# Altium PCB BaseBoardV2.3.PcbDoc
Units mil, origin at the board's own origin, x right, y up, seen from the top; angles counter-clockwise.
Board outline 15200 x 8600 mil, 2 copper layers (Top Layer, Bottom Layer); 48 components, 85 nets, 512 pads, 419 vias.
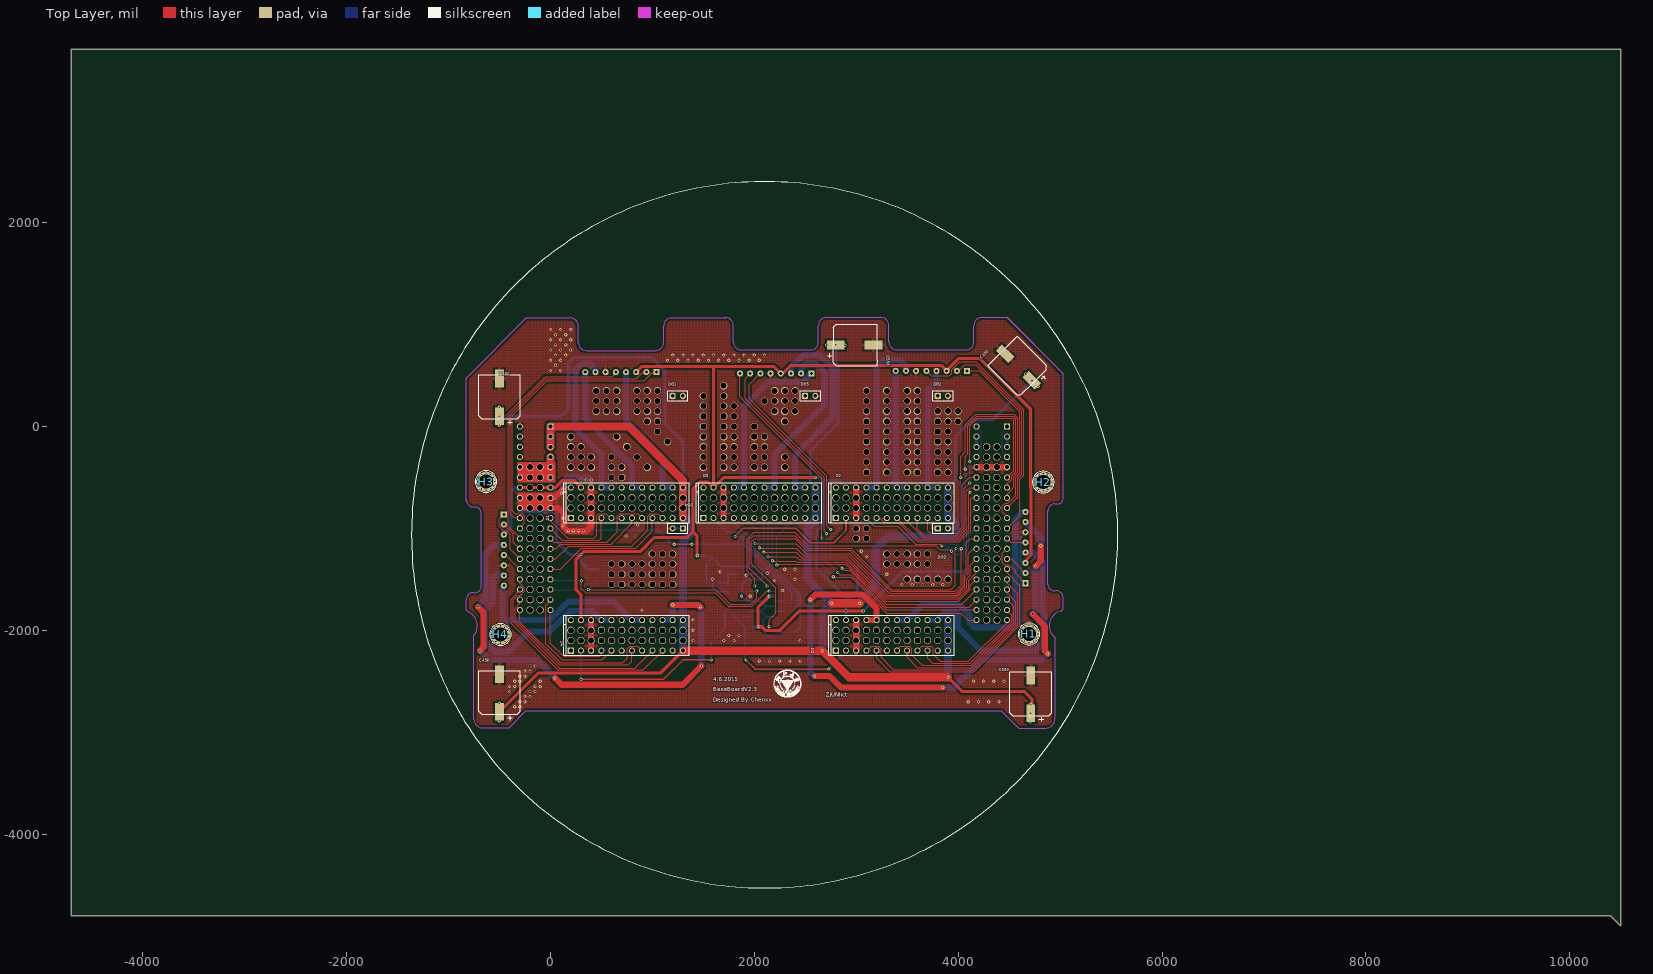
[diagram p0: Top Layer view]
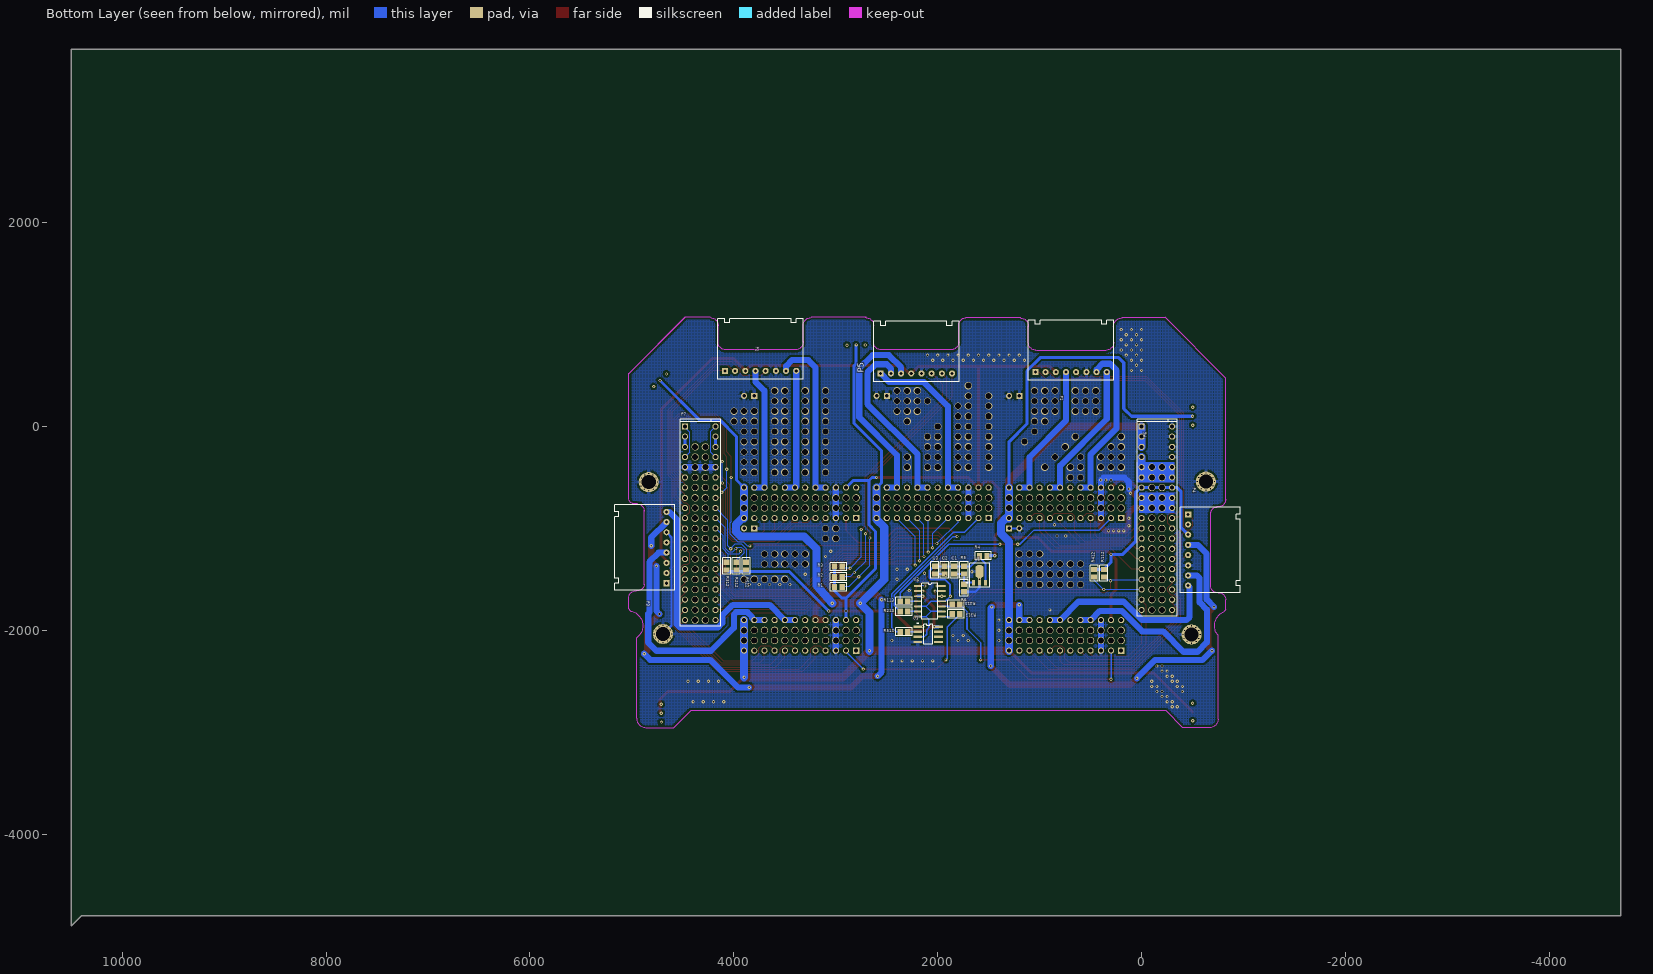
[diagram p1: Bottom Layer view, seen from below]

## Layer stack, top to bottom
Top Solder: solder mask 0.4, Solder Resist, Dk 3.5
Top Layer: signal copper 1.4
Dielectric1: dielectric 12.6, FR-4, Dk 4.8
Bottom Layer: signal copper 1.4
Bottom Solder: solder mask 0.4, Solder Resist, Dk 3.5

## Board outline
-4700,3700 10500,3700 10500,-4900 10400,-4800 -4700,-4800

## Design rules (kind name [scope] priority, off if disabled: settings)
Clearance Clearance_1 [(InPolygon)] p1: gap=20 ignorepadtopadclearanceinfootprint=FALSE except(0: Arc-Hole Track-Hole SMDPad-Hole THPad-Hole Via-Hole Fill-Hole Poly-Hole Region-Hole Text-Hole)
Clearance [All] p2: gap=8 ignorepadtopadclearanceinfootprint=FALSE except(0: Arc-Hole Track-Hole SMDPad-Hole THPad-Hole Via-Hole Fill-Hole Poly-Hole Region-Hole Text-Hole)
ComponentClearance [All] p1 off: gap=10 collisioncheckmode=3 verticalgap=10 showdistances=FALSE
FabricationTestPointUsage TestPointUsage [All] p1: valid=0 allowmultiple=FALSE
FabricationTestpoint Testpoint [All] p1: side=3 testpointundercomponent=TRUE minsize=40 maxsize=100 preferedsize=60 minholesize=0 maxholesize=40 preferedholesize=32 testpointgrid=1 allowsidetop=TRUE allowsidebottom=TRUE usegrid=TRUE gridtolerance=0.01
Height [All] p1 off: minheight=0 maxheight=1000 prefheight=500
HoleSize [All] p1: absolutevalues=TRUE maxlimit=150 minlimit=1 maxpercent=80.000 minpercent=20.000
HoleToHoleClearance [All] p1: gap=5 allowstackedmicrovias=TRUE
MinimumSolderMaskSliver [All] p1 off: minsoldermaskwidth=10
NetAntennae [All] p1 off: netantennaetolerance=0
PlaneConnect [All] p1: planeconnectstyle=Relief reliefexpansion=20 reliefentries=4 reliefconductorwidth=30 reliefairgap=10
PolygonConnect PolygonConnect_1 [(IsVia)] p1: connectstyle=Direct reliefconductorwidth=40 reliefentries=4 polygonreliefangle="90 Angle" airgapwidth=10
PolygonConnect [All] p2: connectstyle=Relief reliefconductorwidth=30 reliefentries=4 polygonreliefangle="90 Angle" airgapwidth=10
RoomDefinition Sheet1 [InComponentClass('Sheet1')] p1 off: confinementstyle=ConfineIn formatcopy=TRUE lockcomponents=FALSE outline -10000,-8500 -8000,-8500 -8000,-7500 -10000,-7500
RoutingVias [All] p1: holewidth=15.75 width=31.5 viastyle="Through Hole" minholewidth=15.75 minwidth=31.5 maxholewidth=15.75 maxwidth=31.5
SilkToSilkClearance [All] p1 off: silktosilkclearance=10
SilkToSolderMaskClearance SilkscreenOverComponentPads [IsPad] p1 off: minsilkscreentomaskgap=10 clearancetoexposedcopper=TRUE
SolderMaskExpansion [All] p1: expansion=4
Width [All] p1: maxlimit=80 minlimit=8 preferedwidth=10
19 further rules are at their usual default settings.

## Components (designator, comment, footprint, x,y, rotation, side; value= is the part's Value field where it differs from the comment)
C1 "0.1uF" 0805 1838,-1409.4 r90 bottom
C2 "1uF" 0805 1933,-1409.4 r90 bottom
C3 "0.1uF" 0805 2028,-1409.4 r90 bottom
C150 "470uF" "Cap - duplicate1" -500,100 r0 top
C250 "470uF" "Cap - duplicate1" 4722,452 r45 top
C350 "470uF" "Cap - duplicate1" 4713,-2813 r0 top
C450 "470uF" "Cap - duplicate1" -500,-2800 r0 top
C550 "470uF" "Cap - duplicate1" 2800,798 r270 top
D1 "header-12X2" Header-12X2-wgj 200,-900 r90 top
D2 "header-12X2" Header-12X2-wgj 2800,-900 r90 top
D3 "header-12X2" Header-12X2-wgj 2800,-2200 r90 top
D4 "header-12X2" Header-12X2-wgj 200,-2200 r90 top
D5 "header-12X2" Header-12X2-wgj 1500,-900 r90 top
DG1 "Header 2" HDR1X2 1200,300 r0 top
DG2 "Header 2" HDR1X2 3800,300 r0 top
DG3 "Header 2" HDR1X2 3800,-1000 r0 top
DG4 "Header 2" HDR1X2 1300,-1000 r180 top
DG5 "Header 2" HDR1X2 2500,300 r0 top
H1 "BNC" BNC 4695,-2036 r0 top
H2 "BNC" BNC 4835,-546 r0 top
H3 "BNC" BNC -631,-541 r0 top
H4 "BNC" BNC -490,-2041 r0 top
P1 "Header_8P" Header_8P 1042,533 r270 bottom locked
P2 "Header_8P" Header_8P 4088,545 r270 bottom locked
P3 "Header_8P" Header_8P 4660,-1538 r180 bottom locked
P4 "Header_8P" Header_8P -457,-862 r0 bottom locked
P5 "Header_8P" Header_8P 2560,520 r270 bottom
P6 "Header_19*2P" Header_19*2P 0,0 r180 bottom locked
P7 "Header_20*2P" Header_20*2P 4480,-0.01 r180 bottom locked
R1 "res" 0805 2975,-1575 r180 bottom
R2 "res" 0805 2975,-1475 r180 bottom
R3 "res" 0805 2975,-1375 r180 bottom
R4 "470" 0805 1554,-1270 r180 bottom
R5 "1.6k" 0805 1743,-1409.4 r90 bottom
R6 "22k" 0805 1743,-1584.4 r90 bottom
R112 "15K" 0805 370,-1440 r90 bottom
R113 "10k" 0805 2331,-1715 r180 bottom
R212 "15K" 0805 3975,-1370 r270 bottom
R213 "10k" 0805 2331,-1815 r180 bottom
R312 "15K" 0805 4070,-1370 r270 bottom
R313 "10k" 0805 1821,-1840 r180 bottom
R412 "15K" 0805 465,-1440 r90 bottom
R413 "10k" 0805 1821,-1745 r180 bottom
R512 "15K" 0805 3880,-1370 r270 bottom
R513 "10k" 0805 2331,-2015 r180 bottom
U1 "TL431CLP" SOT89 1588,-1527 r0 bottom
U2 "LM339" SOP14 2196,-1565 r180 bottom
U3 "LM393" LM393 2196,-1965 r180 bottom

## Footprints (in the part's own frame and the unit in brackets; to place one, negate y for a bottom-side part, rotate by r counter-clockwise, add the part's x,y. Pads: shape width x height; smd on the part's side, far side on the other; paste and mask are expansions set on the pad)
0805 [mm]
  rect 1.3x1.5 smd: 1(-0.95,0) 2(0.95,0)
  silkscreen extent -2.03,-1.02 2.03,1.02
BNC [mm]
  round 5 hole 3.5: 1(0,0)
  silkscreen extent -2.7,-2.7 2.7,2.7
"Cap - duplicate1" [mm]
  rect 2.2x4.4 smd: 1(0,0) 2(0,9.398)
  silkscreen extent -5.21,-2.03 5.21,10.29
HDR1X2 [mm] "Connector; Header; 2 Position"
  rect 1.5x1.5 hole 0.9: 1(0,0)
  round 1.5 hole 0.9: 2(2.54,0)
  silkscreen extent -1.27,-1.27 3.81,1.27
Header-12X2-wgj [mm]
  round 1.8 hole 1.5: 0(2.54,-2.54) 0(2.54,-7.62) 0(2.54,-12.7) 0(2.54,-10.16) 0(2.54,-20.32) 0(2.54,-17.78) 0(2.54,-15.24) 0(2.54,0) 0(2.54,-5.08) 0(2.54,-25.4) 0(2.54,-22.86) 0(2.54,-27.94) 0(5.08,-5.08) 0(5.08,-2.54) 0(5.08,-15.24) 0(5.08,-12.7) 0(5.08,-10.16) 0(5.08,-7.62) 0(5.08,-20.32) 0(5.08,-17.78) 0(5.08,0) 0(5.08,-27.94) 0(5.08,-25.4) 0(5.08,-22.86)
  rect 1.524x1.524 hole 1: 1(0,0)
  round 1.524 hole 1: 2(7.62,0) 3(0,-2.54) 4(7.62,-2.54) 5(0,-5.08) 6(7.62,-5.08) 7(0,-7.62) 8(7.62,-7.62) 9(0,-10.16) 10(7.62,-10.16) 11(0,-12.7) 12(7.62,-12.7) 13(0,-15.24) 14(7.62,-15.24) 15(0,-17.78) 16(7.62,-17.78) 17(0,-20.32) 18(7.62,-20.32) 19(0,-22.86) 20(7.62,-22.86) 21(0,-25.4) 22(7.62,-25.4) 23(0,-27.94) 24(7.62,-27.94)
  silkscreen extent -1.11,-29.5 8.89,1.78
Header_8P [mil] "Used for Motor connecter in ZJUNlict"
  rect 60x60 hole 30: 1(0,0)
  round 60 hole 30: 2(0,100) 3(0,200) 4(0,300) 5(0,400) 6(0,500) 7(0,600) 8(0,700)
  silkscreen extent -510,-70 80,770
Header_19*2P [mil] "Used for CoreBoard connector in ZJUNlict"
  round 70.87 hole 59.06: 0(100,-1500) 0(100,-1400) 0(100,-1300) 0(100,-1200) 0(100,-1100) 0(100,-1000) 0(100,-1800) 0(100,-1700) 0(100,-1600) 0(100,-900) 0(200,-1500) 0(200,-1400) 0(200,-1300) 0(200,-1200) 0(200,-1100) 0(200,-1000) 0(200,-900) 0(200,-1800) 0(200,-1700) 0(200,-1600)
  round 70.87 hole 59.05: 0(100,-800) 0(100,-700) 0(100,-600) 0(100,-500) 0(100,-400) 0(200,-800) 0(200,-700) 0(200,-600) 0(200,-500) 0(200,-400)
  rect 60x60 hole 39.37: 1(0,0)
  round 60 hole 39.37: 2(300,0) 3(0,-100) 4(300,-100) 5(0,-200) 6(300,-200) 7(0,-300) 8(300,-300) 9(0,-400) 10(300,-400) 11(0,-500) 12(300,-500) 13(0,-600) 14(300,-600) 15(0,-700) 16(300,-700) 17(0,-800) 18(300,-800) 19(0,-900) 20(300,-900) 21(0,-1000) 22(300,-1000) 23(0,-1100) 24(300,-1100) 25(0,-1200) 26(300,-1200) 27(0,-1300) 28(300,-1300) 29(0,-1400) 30(300,-1400) 31(0,-1500) 32(300,-1500) 33(0,-1600) 34(300,-1600) 35(0,-1700) 36(300,-1700) 37(0,-1800) 38(300,-1800)
  silkscreen extent -44,-1861 350,70
Header_20*2P [mm] "Used for CoreBoard connector in ZJUNlict"
  round 1.8 hole 1.5: 0(2.54,-38.1) 0(2.54,-35.56) 0(2.54,-33.02) 0(2.54,-30.48) 0(2.54,-27.94) 0(2.54,-25.4) 0(2.54,-20.32) 0(2.54,-48.26) 0(2.54,-45.72) 0(2.54,-43.18) 0(2.54,-40.64) 0(2.54,-22.86) 0(2.54,-17.78) 0(2.54,-15.24) 0(2.54,-12.7) 0(2.54,-10.16) 0(2.54,-7.62) 0(2.54,-5.08) 0(5.08,-38.1) 0(5.08,-35.56) 0(5.08,-33.02) 0(5.08,-30.48) 0(5.08,-27.94) 0(5.08,-25.4) 0(5.08,-22.86) 0(5.08,-20.32) 0(5.08,-48.26) 0(5.08,-45.72) 0(5.08,-43.18) 0(5.08,-40.64) 0(5.08,-17.78) 0(5.08,-15.24) 0(5.08,-12.7) 0(5.08,-10.16) 0(5.08,-7.62) 0(5.08,-5.08)
  rect 1.524x1.524 hole 1: 1(0,0)
  round 1.524 hole 1: 2(7.62,0) 3(0,-2.54) 4(7.62,-2.54) 5(0,-5.08) 6(7.62,-5.08) 7(0,-7.62) 8(7.62,-7.62) 9(0,-10.16) 10(7.62,-10.16) 11(0,-12.7) 12(7.62,-12.7) 13(0,-15.24) 14(7.62,-15.24) 15(0,-17.78) 16(7.62,-17.78) 17(0,-20.32) 18(7.62,-20.32) 19(0,-22.86) 20(7.62,-22.86) 21(0,-25.4) 22(7.62,-25.4) 23(0,-27.94) 24(7.62,-27.94) 25(0,-30.48) 26(7.62,-30.48) 27(0,-33.02) 28(7.62,-33.02) 29(0,-35.56) 30(7.62,-35.56) 31(0,-38.1) 32(7.62,-38.1) 33(0,-40.64) 34(7.62,-40.64) 35(0,-43.18) 36(7.62,-43.18) 37(0,-45.72) 38(7.62,-45.72) 39(0,-48.26) 40(7.62,-48.26)
  silkscreen extent -1.11,-49.82 8.89,1.78
LM393 [mm]
  rect 2.2x0.6 smd: 1(0,0) 2(0,-1.27) 3(0,-2.54) 4(0,-3.81) 5(5.2,-3.81) 6(5.2,-2.54) 7(5.2,-1.27) 8(5.2,0)
  silkscreen extent -0.12,-4.4 3.7,0.97
SOP14 [mm]
  rect 2x0.45 smd: 1(0,0)
  oval 2x0.45 smd: 2(0,-1.27) 3(0,-2.54) 4(0,-3.81) 5(0,-5.08) 6(0,-6.35) 7(0,-7.62) 8(6,-7.62) 9(6,-6.35) 10(6,-5.08) 11(6,-3.81) 12(6,-2.54) 13(6,-1.27) 14(6,0)
  silkscreen extent 1,-8.25 5,0.63
SOT89 [mm]
  oct 1.9x3.3 smd: 0(0.051,-2.632)
  rect 0.7x1.35 smd: 1(1.551,0.143) 3(-1.449,0.143)
  rect 0.7x1.8 smd: 2(0.051,-0.082)
  silkscreen extent -2.45,-4.73 3.33,1.27

## Part data
C1 C2 C3: library part cap
C150 C250 C350 C450 C550: library part cap-pol
DG1 DG2 DG3 DG4 DG5: "Header, 2-Pin"
P1 P2 P3 P4 P5: "Used for Motor connection in ZJUNlict"
R4 R5 R6 R112 R113 R212 R213 R312 R313 R412 R413 R512 R513: library part res

## Via types
v1: diameter 31.5, hole 15.75, Top Layer to Bottom Layer, 190 vias
v2: diameter 70.87, hole 59.06, Top Layer to Bottom Layer, 181 vias
v3: diameter 25, hole 12, Top Layer to Bottom Layer, 48 vias

## Nets (pads, with @x,y where several pads share a name; then routed paths per layer and width w, separated by ;. In a path a pad name is that pad's centre, name@x,y a point inside that pad or via, vN(x,y) a via of type N, cw(c..) or ccw(c..) an arc to the next point about the centre after c; other vN are vias at no path point)
+5V: D1.4 D2.4 D3.4 D4.4 D5.4 P1.3 P2.3 P3.3 P4.3 P5.4 P6.0@-100,-600 P6.0@-200,-600 P6.13 P6.14 R1.1 R2.1 R3.1 R4.2 R112.2 R212.2 R312.2 R412.2 R512.2 U2.3 U3.8 | length 18479
  Top Layer w30: P6.14 -200,-600 -100,-600 P6.13 49,-600 120,-529 229,-529 D1.4 ; D4.4 300,-1652 253,-1605 253,-1302 v1(300,-1255) 330,-1225 885,-1225 1020,-1090 1344.14,-1090 1400,-1034.14 ; P1.3 897,588 1600,588 ; v1(1440,-1268) 1439,-1267 1439,-1073.14 1400,-1034.14 ; v1(2146,-1665) 2036,-1775 v1(2036,-1965) 2075,-1965 2113.75,-2003.75 2246.25,-2003.75 2440,-1810 v1(3070,-1810) ; v1(2600,-500) 1700,-500 D5.4 ; P3.3 4660,-1315.79 4715,-1260.79 4715,-600.55 4711.57,-597.13 4711.57,168.43 4215,665 4001.94,665 3888,551.06 P2.3 3833,600 2360,600 2280,520 P5.4 2192,588 1600,588 ; 1400,-1034.14 1400,-610 1465,-545 1545,-545 D5.4 ; D5.4 1600,588
  Bottom Layer w30: P4.3 -385,-990 -385,-635 -350,-600 P6.14 -200,-600 -100,-600 P6.13 ; P6.13@20.36,-590 20.36,-610.01 62,-651.64 62,-1132 185,-1255 v1(300,-1255) 300,-1332.6 R112.2 R412.2 ; v1(1440,-1268) 1514.6,-1268 R4.2 ; U3.8 U3.8@2031.75,-1965 ; v1(2146,-1665) U2.3 ; v1(2600,-500) 2645,-500 2675,-530 ; D3.4 2900,-1685 ; D2.4 2830,-530 2675,-530 ; R3.1 R2.1 R1.1 3012.4,-1612.6 2940,-1685 2900,-1685 ; v1(3070,-1810) 3455,-1425 4052.4,-1425 R312.2 ; 2675,-530 2675,-965 2610,-1030 2610,-1395 2900,-1685
  other v1: 2900,-1810
+16V1: P6.0@-100,-400 P6.0@-100,-500 P6.0@-200,-400 P6.0@-200,-500 P6.7 P6.9 P6.10 P6.11 P6.12 | length 400
  Top Layer w80: P6.11 P6.9 P6.7
  Bottom Layer w80: P6.11 P6.9 P6.7
+16V2: C150.1 C250.1 C350.1 C450.1 C550.1 D1.0@1300,-700 D1.0@1300,-800 D1.23 D1.24 D2.0@3900,-700 D2.0@3900,-800 D2.23 D2.24 D3.0@3900,-2000 D3.0@3900,-2100 D3.23 D3.24 D4.0@1300,-2000 D4.0@1300,-2100 D4.23 D4.24 D5.0@2600,-700 D5.0@2600,-800 D5.23 D5.24 P6.1 P6.3 P6.5 | length 20775.9
  Top Layer w30: C450.1 -117,-2417 1083,-2417 D4.23 ; v1(3900,-2460) 4040,-2600 4650,-2600 4725,-2675 4725,-2800 4713,-2812 v1(4713,-2813) ; C250.1@4724,450 v1(4725,450)
  Top Layer w80: P6.5 P6.3 P6.1 770,0 1300,-530 D1.24 D1.23 ; D4.23 v1@2669.29,-2200 ; v1@2669.64,-2200.36 2929.29,-2460 v1(3900,-2460) ; v1(2760,-1735) v1(3035,-1735)
  Bottom Layer w30: v1(-500,100) 100,100 175,175 175,625 225,675 995.35,675 1125,545.35 1125,25 1300,-150 D1.24 ; D5.24 2550,-550 2550,-240 2823,33 2823,591.95 2800,614.95 v1(2800,800) ; D2.24 3975,-525 3975,-100 4139.29,64.29 4339.29,64.29 v1(4725,450)
  Bottom Layer w80: P6.5 P6.3 P6.1 ; D4.23 D4.24 1300,-1129.77 1379.53,-1050.24 1379.53,-949.76 1329.77,-900 D1.23 D1.24 ; D5.24 D5.23 2600,-913.14 2525,-988.14 2525,-1500 v1(2760,-1735) 2750,-1747.9 2670,-1827.9 v1(2670,-2200) ; v1(3035,-1735) 3190,-1560 3190,-1200 3310,-1080 3932.47,-1080 3979.53,-1032.94 ; v1(3900,-2460) D3.23 ; D3.23@3900,-2213.14 D3.23 ; D3.24 D3.23 ; D2.24 D2.23 3917.22,-900 3980,-962.78 3980,-1030
  other v1: 4711,-2900 -502,-2887 4712,-2726 -500,-2715 -502,12 -501,189 4786,391 4662,515 2890,797 2712,799
A_1: D1.8 D1.10 P1.7 | length 1628.2
  Bottom Layer w60: P1.7 442,558 385,615 310,615 245,550 245,-20 500,-275 D1.8 D1.10
A_2: D2.8 D2.10 P2.7 | length 1668
  Bottom Layer w60: D2.8 D2.10 3200,580 3270,650 3430,650 3488,592 P2.7
A_3: D3.8 D3.10 P3.7 | length 5629.6
  Top Layer w60: v1(2550,-1700) 2603,-1647 3057.31,-1647 3200,-1789.69 D3.10 D3.8 ; v1(2590,-2450) 2740,-2450 2850,-2560 v1(3850,-2560) ; v1(4730,-1840) 4850,-1960 4850,-2200 v1(4880,-2230) ; v1(4760,-1370) 4810,-1320 v1(4810,-1170)
  Bottom Layer w60: v1(2550,-1700) 2550,-2410 v1(2590,-2450) ; v1(3850,-2560) 3960,-2560 4230,-2290 4820,-2290 v1(4880,-2230) ; P3.7 4810,-1088.01 v1(4810,-1170) ; v1(4730,-1840) 4760,-1810 v1(4760,-1370)
A_4: D4.8 D4.10 P4.7 | length 2264.8
  Bottom Layer w60: P4.7 -542,-1462 -569,-1489 -569,-1725.17 -641.16,-1797.32 -641.16,-2118.84 -550,-2210 -410,-2210 -210,-2010 -6.17,-2010 193.83,-1810 410,-1810 D4.8 D4.10
A_DB: D5.8 D5.10 P5.1 | length 1692.5
  Bottom Layer w60: D5.8 D5.10 1900,200 2135.53,435.53 2475.53,435.53 P5.1
AB_1: D1.9 P6.19 | length 924.8
  Top Layer w10: P6.19 0,-925 170,-1095 425,-1095 453,-1067 453,-877 475,-855 545,-855 590,-900 D1.9
AB_2: D2.9 P7.16 | length 1439.6
  Top Layer w10: D2.9 3236.36,-900 3281.36,-945 3416.72,-945 3603.72,-1132 4013.14,-1132 4122,-1023.14 4122,-708 4129.99,-700.01 P7.16
AB_3: D3.9 P7.29 | length 2325.1
  Top Layer w10: D3.9 3200,-2275 3330,-2405 4151.78,-2405 4605,-1951.78 4605,-1561.37 4480,-1436.37 P7.29
AB_4: D4.9 P6.35 | length 1197.2
  Top Layer w10: P6.35 0,-1710 -45,-1755 -45,-2130 115,-2290 510,-2290 D4.9
AB_DB: D5.9 P7.26 | length 3032.8
  Top Layer w10: v1(2050.29,-1190.29) 2052.72,-1192.72 2410,-1192.72 2487.28,-1270 2927,-1270 3311,-1654 3986.91,-1654 4066,-1574.91 4066,-1474 4100,-1440 4100,-1250 4149.99,-1200.01 P7.26
  Bottom Layer w10: D5.9 2047.87,-1047.87 2047.87,-1187.87 v1(2050.29,-1190.29)
AT_1: D1.7 P6.21 | length 750.9
  Top Layer w10: P6.21 115,-1115 480,-1115 500,-1095 D1.7
AT_2: D2.7 P7.15 | length 3592.4
  Top Layer w10: D2.7 3177,-977 3409,-977 3586,-1154 3821,-1154 3839,-1172 v1(3843,-1172) ; v1(4025,-500) 4025,-295 4070,-250 4070,16.57 4173.43,120 4546.57,120 4585,81.57 4585,-451.57 4545,-491.58 4545,-598.65 4480,-663.65 P7.15
  Bottom Layer w10: v1(3843,-1172) 3847,-1176 3864,-1176 3905.47,-1134.53 3955.72,-1134.53 4034.53,-1055.72 4034.53,-944.28 4025,-934.75 v1(4025,-500)
AT_3: D3.7 P7.31 | length 2337.8
  Top Layer w10: D3.7@3100,-2220 D3.7 3110,-2200 3155,-2155 3218.64,-2155 3245,-2181.36 3245,-2265 3365,-2385 4143.5,-2385 4585,-1943.5 4585,-1641.37 4480,-1536.37 P7.31
AT_4: D4.7 P6.37 | length 922.1
  Top Layer w10: P6.37 0,-2125 130,-2255 480,-2255 500,-2235 D4.7
AT_DB: D5.7 P7.24 | length 3162
  Top Layer w10: v1(2007.87,-1147.87) 2010.29,-1150.29 2410,-1150.29 2509.71,-1250 2936,-1250 3322,-1636 3979.46,-1636 4048,-1567.46 4048,-1462 4080,-1430 4080,-1140 4119.99,-1100.01 P7.24
  Bottom Layer w10: D5.7 1800,-940 v1(2007.87,-1147.87)
B_1: D1.14 D1.16 P1.8 | length 1422.7
  Bottom Layer w60: P1.8 342,73 800,-385 D1.14 D1.16
B_2: D2.14 D2.16 P2.8 | length 1250
  Bottom Layer w60: P2.8 3388,-588 D2.14 D2.16
B_3: D3.14 D3.16 P3.8 | length 2533
  Bottom Layer w60: D3.14 D3.16 3650,-1750 4010,-1750 4112,-1852 4112,-1928.17 4157.26,-1973.44 4526.56,-1973.44 4560,-1940 4560,-910 4632,-838 P3.8
B_4: D4.14 D4.16 P4.8 | length 1845.1
  Bottom Layer w60: P4.8 -470,-1575 -470,-1869.71 -439.35,-1900.37 -4.2,-1900.37 176.17,-1720 620,-1720 D4.14 D4.16
B_DB: D5.14 D5.16 P5.2 | length 1762.7
  Bottom Layer w60: D5.14 D5.16 2200,-270 2690,220 2690,530 2610,610 2500,610 2460,570 P5.2
BB_1: D1.15 P6.23 | length 1139.1
  Top Layer w10: P6.23 35,-1135 555,-1135 655,-1035 655,-881.36 681.36,-855 855,-855 D1.15
BB_2: D2.15 P7.14 | length 1200
  Top Layer w10: D2.15 3500,-928 3664,-1092 3996.57,-1092 4082,-1006.57 4082,-630.5 4112.49,-600.01 P7.14
BB_3: D3.15 P7.33 | length 1719.9
  Top Layer w10: D3.15 3500,-2265 3600,-2365 4135.21,-2365 4565,-1935.22 4565,-1721.37 4480,-1636.37 P7.33
BB_4: D4.15 P6.38 | length 1627.6
  Top Layer w10: P6.38 -300,-1920.15 99.85,-2320 710,-2320 755,-2275 755,-2181.36 781.36,-2155 855,-2155 D4.15
BB_DB: D5.15 P7.30 | length 2806
  Top Layer w10: v1(2135.15,-1275.15) 2137.57,-1277.57 2410,-1277.57 2442.43,-1310 2908.4,-1310 3290.4,-1692 3999.82,-1692 4102,-1589.82 4102,-1512 4180,-1434 P7.30
  Bottom Layer w10: v1(2135.15,-1275.15) 2135.15,-964.85 D5.15
BT_1: D1.13 P6.25 | length 953.6
  Top Layer w10: P6.25 55,-1200 100,-1155 595,-1155 800,-950 D1.13
BT_2: D2.13 P7.13 | length 3120.9
  Top Layer w10: D2.13 3612,-1112 4004.85,-1112 4102,-1014.85 4102,-660 v1(4117,-645) ; v1(4070,-420) 4070,-295 4095,-270 4095,13.28 4181.72,100 4538.28,100 4565,73.28 4565,-443.29 4525,-483.29 4525,-518.65 4480,-563.65 P7.13
  Bottom Layer w10: v1(4070,-420) 4070,-600 4115,-645 v1(4117,-645)
BT_3: D3.13 P7.35 | length 1712.5
  Top Layer w10: D3.13 3400,-2185 3430,-2155 3518.64,-2155 3545,-2181.36 3545,-2240 3650,-2345 4126.93,-2345 4545,-1926.93 4545,-1765.01 P7.35
BT_4: D4.13 P6.36 | length 1667.4
  Top Layer w10: P6.36 -300,-1736.36 -345,-1781.36 -345,-1903.43 91.57,-2340 765,-2340 800,-2305 D4.13
BT_DB: D5.13 P7.28 | length 2869
  Top Layer w10: v1(2092.72,-1232.72) 2095.15,-1235.15 2410,-1235.15 2464.85,-1290 2914,-1290 3297,-1673 3993.37,-1673 4084,-1582.37 4084,-1496 4120,-1460 4120,-1360.01 P7.28
  Bottom Layer w10: v1(2092.72,-1232.72) 2092.72,-907.28 D5.13
C_1: D1.20 D1.22 P1.4 | length 1381.3
  Bottom Layer w60: P1.4 742,58 1100,-300 D1.20 D1.22
C_2: D2.20 D2.22 P2.4 | length 1281.4
  Bottom Layer w60: P2.4 3788,438 3700,350 D2.20 D2.22
C_3: D3.20 D3.22 P3.4 | length 2446.5
  Bottom Layer w60: D3.20 D3.22 3822,-1878 3822,-1867.69 3867.69,-1822 3976.29,-1822 4000,-1845.71 4000,-1975.71 4224.29,-2200 4760,-2200 4840,-2120 4840,-1838 4828,-1826 4828,-1328 4738,-1238 P3.4
C_4: D4.20 D4.22 P4.4 | length 4730
  Top Layer w60: v1(-710,-1770) -658,-1822 -658,-2168 v1(-690,-2200) ; v1(46.01,-2470) 109.76,-2533.75 1296.25,-2533.75 v1(1480,-2350) ; v1(1200,-1750) 1450,-1750 v1(1470,-1770)
  Bottom Layer w60: v1(-710,-1770) -637,-1697 -637,-1247 -552,-1162 P4.4 ; v1(-690,-2200) -599,-2291 -132.99,-2291 v1(46.01,-2470) ; D4.20 D4.22 v1(1200,-1750) ; v1(1470,-1770) 1480,-1780 v1(1480,-2350)
C_DB: D5.20 D5.22 P5.3 | length 1996.8
  Bottom Layer w60: P5.3 2360,580 2480,700 2640,700 2770,570 2770,90 2400,-280 D5.20 D5.22
CAP_BATTERY: P7.1 P7.7 | length 347.3
  Top Layer w10: P7.1@4480,-10.01 P7.1
  Bottom Layer w10: P7.7 4435,-255.01 4435,-55.01 4480,-10.01 P7.1
CB_1: D1.19 P6.27 | length 1384.2
  Top Layer w10: P6.27 55,-1300 180,-1175 800,-1175 955,-1020 955,-881.36 981.36,-855 1055,-855 D1.19
CB_2: D2.19 P7.12 | length 1083.5
  Top Layer w10: D2.19 3700,-1021 3726,-1047 3985,-1047 4042,-990 4042,-571.43 4113.42,-500.01 P7.12
CB_3: D3.19 P7.37 | length 1226.3
  Top Layer w10: D3.19 3700,-2275 3750,-2325 4118.65,-2325 4525,-1918.65 4525,-1845.01 P7.37
CB_4: D4.19 P6.34 | length 2119.5
  Top Layer w10: P6.34 -300,-1608.08 -385,-1693.08 -385,-1931.57 72.43,-2389 911,-2389 D4.19
CB_DB: D5.19 P7.34 | length 2723.1
  Top Layer w10: v1(2220,-1360) 2229.85,-1350.15 2897.63,-1350.15 3293.49,-1746 4034.01,-1746 P7.34
  Bottom Layer w10: v1(2220,-1360) 2220,-1080 D5.19
CHIP: P7.2 P7.8 | length 344.3
  Top Layer w10: P7.2@4180,-7 P7.2
  Bottom Layer w10: P7.8 4225,-255.01 4225,-45.01 P7.2
CT_1: D1.17 P6.29 | length 1283.3
  Top Layer w10: P6.29 98,-1400 303,-1195 835,-1195 1000,-1030 D1.17
CT_2: D2.17 P7.11 | length 2708.3
  Top Layer w10: D2.17 3600,-1002.54 3669.46,-1072 3988.28,-1072 4062,-998.28 4062,-608 v1(4115,-555) ; v1(4115,-345) 4115,5 4190,80 4530,80 4545,65 4545,-435.01 P7.11
  Bottom Layer w10: v1(4115,-555) v1(4115,-345)
CT_3: D3.17 P7.39 | length 1176.6
  Top Layer w10: D3.17 3645,-2155 3735,-2155 3755,-2175 3755,-2233.64 3826.36,-2305 4098.43,-2305 4480,-1923.43 P7.39
CT_4: D4.17 P6.32 | length 2117.8
  Top Layer w10: P6.32 -300,-1536.37 -255,-1581.36 -255,-1618.64 -291.36,-1655 -318.64,-1655 -365,-1701.36 -365,-1911.72 94.14,-2370.86 829.14,-2370.86 D4.17
CT_DB: D5.17 P7.32 | length 2746.2
  Top Layer w10: v1(2177.57,-1317.57) 2180,-1320 2410,-1320 2420,-1330 2902.94,-1330 3287.94,-1715 4002.28,-1715 4120,-1597.28 4120,-1560.01 P7.32
  Bottom Layer w10: v1(2177.57,-1317.57) 2177.57,-1022.43 D5.17
CURRENT+_1: D1.3 R113.1 | length 2454.5
  Top Layer w15: v1(1215,-1155) v1(1390,-1155)
  Bottom Layer w15: D1.3 420,-1020 1060,-1020 1195,-1155 v1(1215,-1155) ; v1(1390,-1155) 1891.26,-1155 2368.4,-1632.15 R113.1
CURRENT+_2: D2.3 R213.1 | length 2389.4
  Top Layer w15: v1(1810,-1080) 1890.26,-999.74 2409.74,-999.74 2550,-1140 2780,-1140 2900,-1020 D2.3
  Bottom Layer w15: v1(1810,-1080) 1851.61,-1080 2426,-1654.39 2426,-1757.4 R213.1
CURRENT+_3: D3.3 R313.2 | length 1608.9
  Top Layer w15: v1(1920,-2290) 2010,-2380 v1(2730,-2380)
  Bottom Layer w15: R313.2 1783.6,-1845.06 1906,-1967.47 1906,-2276 v1(1920,-2290) ; v1(2730,-2380) 2900,-2210 D3.3 D3.3@2895.32,-2200
CURRENT+_4: D4.3 R413.2 | length 2268
  Top Layer w15: v1(300,-2480) 1110,-2480 1300,-2290 v1(1580,-2290)
  Bottom Layer w15: v1(300,-2480) D4.3 ; v1(1580,-2290) 1580,-2120 1713,-1987 1713,-1815.6 R413.2
CURRENT+_5: D5.3 R513.1 | length 1587
  Bottom Layer w15: D5.3 1740,-1040 1846.97,-1040 2451,-1644.03 2451,-1971 2407,-2015 R513.1
FAULT_1: P6.31 R112.1 U2.2 | length 2488.6
  Top Layer w10: v1(305,-1513) 305,-1592 346,-1633 1617,-1633 1747.58,-1763.58 1975.7,-1763.58 2124.28,-1615 v1(2146,-1615)
  Bottom Layer w10: P6.31 8,-1508 339.4,-1508 R112.1 ; v1(2146,-1615) U2.2
FAULT_2: P7.20 R212.1 U2.1 | length 3964.6
  Top Layer w10: v1(2126,-1565) 1952.87,-1391.87 1952.87,-1108.85 1991.72,-1070 2398.28,-1070 2525,-1196.72 2944.72,-1196.72 3348,-1600 3930,-1600 3970.28,-1559.72 3970.28,-1208.72 3980,-1199 v1(3980,-1197)
  Bottom Layer w10: v1(2126,-1565) U2.1 ; R212.1@3965,-1322.6 R212.1 3975,-1314.21 3900.28,-1239.49 3900.28,-1210.5 3920.79,-1189.99 3970.49,-1189.99 3979.5,-1199 v1@3980,-1199 ; v1(3980,-1197) v1@3980,-1199 ; P7.20 4084,-996.01 4084,-1194.5 4044.5,-1234 4015,-1234 v1@3980,-1199
FAULT_3: P7.22 R312.1 U2.14 | length 3134.3
  Top Layer w10: v1(2006,-1565) 2006,-1496 1932.87,-1422.87 1932.87,-1100.56 1993.43,-1040 2396.57,-1040 2528.57,-1172 3781,-1172 3821,-1212 3922.29,-1212 v1(3935.28,-1224.99)
  Bottom Layer w10: v1@3930,-1219.71 v1(3935.28,-1224.99) 3935.28,-1235.28 3954,-1254 4052.78,-1254 ; R312.1 4052.78,-1315.38 4052.78,-1254 ; P7.22 4106,-1074.01 4106,-1200.78 4052.78,-1254
FAULT_4: P6.33 R412.1 U2.13 | length 2414.2
  Top Layer w10: P6.33 P6.33@5,-1595 ; v1(372,-1600) 1620,-1600 1763.58,-1743.58 1967.42,-1743.58 2026,-1685 v1(2026,-1615)
  Bottom Layer w10: P6.33 v1(372,-1600) 465,-1507 R412.1 ; U2.13 v1(2026,-1615)
FAULT_DB: P7.18 R512.1 U3.1 | length 4459.7
  Top Layer w10: v1(2146,-1965) 2146,-1895 2208.87,-1832.13 2208.87,-1583.13 1972.87,-1347.13 1972.87,-1133.37 2006.24,-1100 2400,-1100 2516.72,-1216.72 2936.72,-1216.72 3338,-1618 3972,-1618 4030,-1560 v1(4030,-1199)
  Bottom Layer w10: v1(2146,-1965) U3.1 ; R512.1 3875,-1327.6 3875,-1205 3922.77,-1157.23 3989.73,-1157.23 4015,-1182.5 4015,-1184 v1(4030,-1199) 4060,-1169 4060,-920.01 P7.18
GND: C2.1 C3.1 C150.2 C250.2 C350.2 C450.2 C550.2 D1.0@400,-700 D1.0@400,-800 D1.5 D1.6 D2.0@3000,-700 D2.0@3000,-800 D2.5 D2.6 D3.0@3000,-2000 D3.0@3000,-2100 D3.5 D3.6 D4.0@400,-2000 D4.0@400,-2100 D4.5 D4.6 D5.0@1700,-700 D5.0@1700,-800 D5.5 D5.6 D5.21 DG1.1 DG1.2 DG2.1 DG2.2 DG3.1 DG3.2 DG4.1 DG4.2 DG5.1 DG5.2 H1.1 H2.1 H3.1 H4.1 P1.6 P2.6 P3.6 P4.6 P5.5 P6.0@-100,-700 P6.0@-100,-800 P6.0@-200,-700 P6.0@-200,-800 P6.2 P6.4 P6.6 P6.8 P6.15 P6.16 P6.17 P6.18 P7.0@4280,-400.01 P7.0@4380,-400.01 P7.9 P7.10 R6.1 U1.0 U1.2 U2.12 U3.4 | length 6402.5
  Top Layer w60: P6.17 76,-800 130,-854 130,-990 165,-1025 355,-1025 400,-980 ; P6.15 39,-700 v1(125,-614) ; D4.5 D4.6 ; D5.5 D5.6 ; D3.5 D3.6 ; D2.5 D2.6 ; P7.10 P7.9
  Top Layer w70: 400,-980 D1.6
  Bottom Layer w20: DG4.2 DG4.1 ; U1.2 1590,-1582 1629.8,-1621.8 R6.1 ; C2.1 C3.1 ; P3.6 4612,-1086 4612,-1953 4712.68,-2053.68 H1.1
  Bottom Layer w60: v1(125,-614) 125,-544 168,-501 372,-501 400,-529 D1.6 D1.5 ; D4.5 D4.6 ; D5.5 D5.6 ; D3.5 D3.6 ; D2.5 D2.6 ; P7.10 P7.9
  other v1: -350,-2750 -300,-2750 -300,-2700 -250,-2700 4100,-2700 4200,-2700 4300,-2700 4400,-2700 -250,-2650 -200,-2650 -400,-2600 -200,-2600 -150,-2600 -400,-2550 -350,-2550 -150,-2550 -100,-2550 -350,-2500 -300,-2500 -100,-2500 4150,-2500 4250,-2500 4350,-2500 4450,-2500 -300,-2450 -250,-2450 -250,-2400 -200,-2400 -200,-2350 -150,-2350 2050,-2300 2150,-2300 2250,-2300 2350,-2300 2450,-2300 1400,-2100 1700,-2100 1800,-2100 2450,-2100 1750,-2050 1850,-2050 1400,-2000 1400,-1900 900,-1800 1961,-1665 2280,-1610 3450,-1550 3550,-1550 3650,-1550 3750,-1550 3850,-1550 2200,-1510 1590,-1500 2400,-1500 1920,-1460 3300,-1450 2130,-1440 1665,-1425 2300,-1400 2400,-1400 3100,-1275 3050,-1225 745,-1075 830,-1075 175,-1025 225,-1025 275,-1025 325,-1025 125,-975 855,-965 125,-900 108,-655 300,-525 350,-525 400,-525 0,550 100,550 50,600 0,650 100,650 1150,650 1250,650 1350,650 1450,650 1550,650 1650,650 1750,650 1850,650 1950,650 2050,650 50,700 150,700 1200,700 1300,700 1400,700 1500,700 1600,700 1700,700 1800,700 1900,700 2000,700 2100,700 0,750 100,750 200,750 50,800 150,800 0,850 100,850 200,850 50,900 150,900 0,950 100,950 200,950
  other v2: 600,-1550 700,-1550 800,-1550 900,-1550 1000,-1550 1100,-1550 1200,-1550 3500,-1500 3600,-1500 3700,-1500 3800,-1500 3900,-1500 600,-1450 700,-1450 800,-1450 900,-1450 1000,-1450 1100,-1450 1200,-1450 600,-1350 700,-1350 800,-1350 900,-1350 1000,-1350 1100,-1350 1200,-1350 3300,-1350 3400,-1350 3500,-1350 3600,-1350 3700,-1350 1000,-1250 1100,-1250 1200,-1250 3300,-1250 3400,-1250 3500,-1250 3600,-1250 3700,-1250 3000,-1100 3100,-1100 3000,-1000 3100,-1000 600,-500 700,-500 3100,-450 3300,-450 3500,-450 3600,-450 3800,-450 3900,-450 200,-400 300,-400 400,-400 600,-400 700,-400 950,-400 1500,-400 1700,-400 1800,-400 2000,-400 2100,-400 2300,-400 3100,-350 3300,-350 3500,-350 3600,-350 3800,-350 3900,-350 200,-300 300,-300 400,-300 600,-300 850,-300 1500,-300 1700,-300 1800,-300 2000,-300 2100,-300 2300,-300 3100,-250 3300,-250 3500,-250 3600,-250 3800,-250 3900,-250 200,-200 300,-200 750,-200 1500,-200 1700,-200 1800,-200 2000,-200 2100,-200 1150,-150 3100,-150 3300,-150 3500,-150 3600,-150 3800,-150 3900,-150 200,-100 650,-100 1500,-100 1700,-100 1800,-100 2000,-100 2100,-100 1050,-50 3100,-50 3300,-50 3500,-50 3600,-50 3800,-50 3900,-50 1500,0 1700,0 1800,0 2000,0 950,50 1050,50 2300,50 3100,50 3300,50 3500,50 3600,50 3800,50 3900,50 4000,50 1500,100 1700,100 1800,100 450,150 550,150 650,150 850,150 950,150 1050,150 2200,150 2300,150 2400,150 3100,150 3300,150 3500,150 3600,150 3800,150 3900,150 4000,150 1500,200 1700,200 1800,200 450,250 550,250 650,250 850,250 950,250 1050,250 2100,250 2200,250 2300,250 2400,250 3100,250 3300,250 3500,250 3600,250 1500,300 1700,300 450,350 550,350 650,350 850,350 950,350 1050,350 2200,350 2300,350 2400,350 3100,350 3300,350 3500,350 3600,350 1700,400
  other v3: -490,-2126 4695,-2121 -535,-2111 -445,-2111 4650,-2106 4740,-2106 -560,-2081 -415,-2081 4625,-2076 4770,-2076 -575,-2041 -405,-2041 4610,-2036 4780,-2036 -560,-2001 -420,-2001 4625,-1996 4765,-1996 -530,-1971 -450,-1971 4655,-1966 4735,-1966 -490,-1956 4695,-1951 4835,-631 -631,-626 4790,-616 4880,-616 -676,-611 -586,-611 4765,-586 4910,-586 -701,-581 -556,-581 4750,-546 4920,-546 -716,-541 -546,-541 4765,-506 4905,-506 -701,-501 -561,-501 4795,-476 4875,-476 -671,-471 -591,-471 4835,-461 -631,-456
NetC1_1: C1.1 R5.1 R6.2 U1.1 | length 295.1
  Bottom Layer w20: U1.1 1728.63,-1532.63 R6.2 R5.1 C1.1
NetR113_2: R113.2 U2.4 | length 97.6
  Bottom Layer w15: U2.4 R113.2
NetR213_2: R213.2 U2.6 | length 97.6
  Bottom Layer w15: U2.6 R213.2
NetR313_1: R313.1 U2.8 | length 111.7
  Bottom Layer w15: R313.1 1883.4,-1865 U2.8
NetR413_1: R413.1 U2.10 | length 109.7
  Bottom Layer w15: R413.1 1878.4,-1765 U2.10
NetR513_2: R513.2 U3.2 | length 97.6
  Bottom Layer w15: U3.2 R513.2
SA_1: P1.1 P6.22 | length 2810.9
  Top Layer w10: P6.22 -300,-995 -255,-950 -255,-870 -270,-855 -345,-855 -371.72,-828.28 -371.72,111.72 -35.44,448 920.64,448 1005.64,533 P1.1
SA_2: P2.1 P7.19 | length 1832.7
  Top Layer w10: P2.1 4205,545 4605,145 4605,-459.86 4565,-499.86 4565,-678.65 4488.64,-755.01 4461.36,-755.01 4435,-781.37 4435,-840 4480,-885 P7.19
SA_3: P3.1 P7.25 | length 475.4
  Top Layer w10: P7.25 4435,-1245.01 4435,-1335 4455,-1355 4498.63,-1355 4564.32,-1420.68 4564.32,-1442.32 P3.1
SA_4: P4.1 P6.28 | length 556.3
  Top Layer w10: P4.1 -502,-907 -502,-980.64 -465.64,-1017 -438.36,-1017 -395,-1060.37 -395,-1205 P6.28
SA_DB: P5.6 P7.36 R3.2 | length 3906.5
  Top Layer w10: P5.6 1950,410 1950,270 2709.75,-489.75 2709.75,-975.25 2744.5,-1010 v1(2750,-1010) ; v1(2859.85,-1390.15) 2882.28,-1412.57 2934.6,-1412.57 3294.03,-1772 4108.01,-1772 P7.36
  Bottom Layer w10: v1(2750,-1010) 2750,-1280.29 v1(2859.85,-1390.15) R3.2@2922.45,-1390.15
SB_1: P1.2 P6.20 | length 2588.7
  Top Layer w10: P6.20@-300,-891.93 -358.07,-891.93 -391.72,-858.28 -391.72,120 -43.72,468 840.64,468 905.64,533 P1.2
SB_2: P2.2 P7.17 | length 1863.3
  Top Layer w10: P2.2 4006.78,545 4066.79,605 4175,605 4625,155 4625,-468.14 4585,-508.14 4585,-695.01 P7.17
SB_3: P3.2 P7.27 | length 237.2
  Top Layer w10: P7.27 4522,-1300.01 P3.2
SB_4: P4.2 P6.26 | length 303
  Top Layer w10: P4.2 -365,-1054.01 -365,-1135 P6.26
SB_DB: P5.7 P7.38 R2.2 | length 4001.7
  Top Layer w10: P5.7 1910,470 1910,270 2685,-505 2685,-1029.85 v1(2707.57,-1052.43) ; v1(2817.43,-1432.57) 2839.85,-1455 2951.58,-1455 3296.58,-1800.01 P7.38
  Bottom Layer w10: v1(2707.57,-1052.43) 2707.57,-1322.72 v1(2817.43,-1432.57) 2859.85,-1475 R2.2
SC_1: P1.5 P6.24 | length 2502.4
  Top Layer w10: P6.24 -300,-1090.72 -411.72,-979.01 -411.72,128.28 -52,488 608,488 642,522 P1.5
SC_2: P2.5 P7.21 | length 2487.5
  Top Layer w10: P2.5 3737.99,495 3915,495 3935,515 3935,555.64 4014.36,635 4175,635 4645,165 4645,-476.43 4605,-516.43 4605,-875.01 P7.21
SC_3: P3.5 P7.23 | length 195.7
  Top Layer w10: P7.23 4518,-1138 P3.5
SC_4: P4.5 P6.30 | length 214.2
  Top Layer w10: P4.5 -438,-1262 P6.30
SC_DB: P5.8 P7.40 R1.2 | length 4159.1
  Top Layer w10: P5.8 1860,290 2660.25,-510.25 2660.25,-1089.96 v1(2665.15,-1094.85) ; v1(2775,-1475) 2780,-1480 2951.12,-1480 3302.12,-1831 4031.29,-1831 4100.3,-1900.01 P7.40
  Bottom Layer w10: v1(2665.15,-1094.85) 2665.15,-1365.15 v1(2775,-1475) 2875,-1575 R1.2
SHOOT: P7.4 P7.6 | length 100
  Bottom Layer w30: P7.6 P7.4
VOLTAGE_BATTERY: P7.3 P7.5 | length 100
  Bottom Layer w30: P7.5 P7.3
VREF: C1.2 C2.2 C3.2 R4.1 R5.2 U1.3 U2.5 U2.7 U2.9 U2.11 U3.3 | length 2244.7
  Bottom Layer w15: v1(1876,-1665) 1926,-1715 U2.11 2066,-1715 2116,-1765 ; U2.9 2066,-1815 ; U3.3 2136,-2065 2108.5,-2037.5 2108.5,-1995.79 2086,-1973.29 2086,-1895 2116,-1865 ; U2.7 2116,-1865 ; U2.5 2116,-1765 ; 2066,-1815 2116,-1865 ; 2066,-1815 2116,-1765
  Bottom Layer w20: U1.3@1532,-1532.63 1532,-1344 1591.4,-1284.6 R4.1 1591.4,-1286.4 1677,-1372 C3.2 2036.6,-1372 2083,-1418.4 2083,-1481.92 2079,-1485.92 2079,-1488 2067,-1500 1930,-1500 1879.02,-1550.98 1879.02,-1661.98 v1(1876,-1665)
pads on no net: D1.0@200,-700 D1.0@200,-800 D1.0@300,-700 D1.0@300,-800 D1.0@500,-700 D1.0@500,-800 D1.0@600,-700 D1.0@600,-800 D1.0@700,-700 D1.0@700,-800 D1.0@800,-700 D1.0@800,-800 D1.0@900,-700 D1.0@900,-800 D1.0@1000,-700 D1.0@1000,-800 D1.0@1100,-700 D1.0@1100,-800 D1.0@1200,-700 D1.0@1200,-800 D1.1 D1.2 D1.11 D1.12 D1.18 D1.21 D2.0@2800,-700 D2.0@2800,-800 D2.0@2900,-700 D2.0@2900,-800 D2.0@3100,-700 D2.0@3100,-800 D2.0@3200,-700 D2.0@3200,-800 D2.0@3300,-700 D2.0@3300,-800 D2.0@3400,-700 D2.0@3400,-800 D2.0@3500,-700 D2.0@3500,-800 D2.0@3600,-700 D2.0@3600,-800 D2.0@3700,-700 D2.0@3700,-800 D2.0@3800,-700 D2.0@3800,-800 D2.1 D2.2 D2.11 D2.12 D2.18 D2.21 D3.0@2800,-2000 D3.0@2800,-2100 D3.0@2900,-2000 D3.0@2900,-2100 D3.0@3100,-2000 D3.0@3100,-2100 D3.0@3200,-2000 D3.0@3200,-2100 D3.0@3300,-2000 D3.0@3300,-2100 D3.0@3400,-2000 D3.0@3400,-2100 D3.0@3500,-2000 D3.0@3500,-2100 D3.0@3600,-2000 D3.0@3600,-2100 D3.0@3700,-2000 D3.0@3700,-2100 D3.0@3800,-2000 D3.0@3800,-2100 D3.1 D3.2 D3.11 D3.12 D3.18 D3.21 D4.0@200,-2000 D4.0@200,-2100 D4.0@300,-2000 D4.0@300,-2100 D4.0@500,-2000 D4.0@500,-2100 D4.0@600,-2000 D4.0@600,-2100 D4.0@700,-2000 D4.0@700,-2100 D4.0@800,-2000 D4.0@800,-2100 D4.0@900,-2000 D4.0@900,-2100 D4.0@1000,-2000 D4.0@1000,-2100 D4.0@1100,-2000 D4.0@1100,-2100 D4.0@1200,-2000 D4.0@1200,-2100 D4.1 D4.2 D4.11 D4.12 D4.18 D4.21 D5.0@1500,-700 D5.0@1500,-800 D5.0@1600,-700 D5.0@1600,-800 D5.0@1800,-700 D5.0@1800,-800 D5.0@1900,-700 D5.0@1900,-800 D5.0@2000,-700 D5.0@2000,-800 D5.0@2100,-700 D5.0@2100,-800 D5.0@2200,-700 D5.0@2200,-800 D5.0@2300,-700 D5.0@2300,-800 D5.0@2400,-700 D5.0@2400,-800 D5.0@2500,-700 D5.0@2500,-800 D5.1 D5.2 D5.11 D5.12 D5.18 P6.0@-100,-900 P6.0@-100,-1000 P6.0@-100,-1100 P6.0@-100,-1200 P6.0@-100,-1300 P6.0@-100,-1400 P6.0@-100,-1500 P6.0@-100,-1600 P6.0@-100,-1700 P6.0@-100,-1800 P6.0@-200,-900 P6.0@-200,-1000 P6.0@-200,-1100 P6.0@-200,-1200 P6.0@-200,-1300 P6.0@-200,-1400 P6.0@-200,-1500 P6.0@-200,-1600 P6.0@-200,-1700 P6.0@-200,-1800 P7.0@4280,-200.01 P7.0@4280,-300.01 P7.0@4280,-500.01 P7.0@4280,-600.01 P7.0@4280,-700.01 P7.0@4280,-800.01 P7.0@4280,-900.01 P7.0@4280,-1000.01 P7.0@4280,-1100.01 P7.0@4280,-1200.01 P7.0@4280,-1300.01 P7.0@4280,-1400.01 P7.0@4280,-1500.01 P7.0@4280,-1600.01 P7.0@4280,-1700.01 P7.0@4280,-1800.01 P7.0@4280,-1900.01 P7.0@4380,-200.01 P7.0@4380,-300.01 P7.0@4380,-500.01 P7.0@4380,-600.01 P7.0@4380,-700.01 P7.0@4380,-800.01 P7.0@4380,-900.01 P7.0@4380,-1000.01 P7.0@4380,-1100.01 P7.0@4380,-1200.01 P7.0@4380,-1300.01 P7.0@4380,-1400.01 P7.0@4380,-1500.01 P7.0@4380,-1600.01 P7.0@4380,-1700.01 P7.0@4380,-1800.01 P7.0@4380,-1900.01 U3.5 U3.6 U3.7

## Polygon pours and split planes (outlines as drawn)
GND on Top Layer "Top Layer-No Net" (hatched 90Degree grid 15 track 8, remove dead copper, pour order 0): -1000,1200 5200,1200 5200,-3200 -1000,-3200
GND on Bottom Layer "Top Layer-No Net" (hatched 90Degree grid 15 track 8, remove dead copper, pour order 2): -1100,1200 5100,1200 5100,-3200 -1100,-3200

## Keep-outs
Keep-Out Layer:
  lines w8: 1185,1065 1725,1065
  lines w10: -825,-1800 -825,-1700 ; -825.01,-1699.83 cw(c-755.01,-1699.83) -750,-1630.01 ; -825,-735 -825,475 ; -825,-715 ccw(c-750,-715) -750,-790 ; -824.68,474.65 -230.44,1068.89 ; -775,-790 -735,-790 ; -755,-1630 -735,-1630 ; -750.31,-2050.13 -750.31,-2870.14 ccw(c-667.5,-2872.5) -675,-2955 -405,-2955 -240,-2790 4425,-2790 4595,-2960 4855,-2960 ccw(c4855,-2865) 4950,-2865 ; -750.1,-2049.92 ccw(c-863.7,-1955.06) -805.88,-1818.83 ; -740,-1630 ccw(c-740,-1570) -680,-1570 -680,-845 ; -740,-790 cw(c-740,-850) -680,-850 ; -230,1065 189.9,1065 cw(c189.9,978.71) 276.19,978.71 ; 275,820 275,978.71 ; 275,823.74 ccw(c353.74,823.74) 353.74,745 ; 355,745 1031,745 ; 1031.26,745 ccw(c1031.26,823.74) 1110,823.74 ; 1110,820 1110,985.15 cw(c1188.74,985.15) 1188.74,1063.89 ; 1716.26,1068.89 cw(c1716.26,990.15) 1795,990.15 ; 1795,825 1795,1000 ; 1795,828.74 ccw(c1873.74,828.74) 1873.74,750 2551.26,750 ccw(c2551.26,828.74) 2630,828.74 ; 2630,825 2630,990.15 cw(c2708.74,990.15) 2708.74,1068.89 ; 2700,1070 3242,1070 ; 3241.26,1068.89 cw(c3241.26,990.15) 3320,990.15 ; 3320,825 3320,1000 ; 3320,828.74 ccw(c3398.74,828.74) 3398.74,750 4076.26,750 ccw(c4076.26,828.74) 4155,828.74 ; 4155,825 4155,990.15 cw(c4233.74,990.15) 4233.74,1068.89 ; 4230,1070 4478.46,1070 5030,518.46 ; 4479.56,1065 5009.56,535 ; 4479.56,1068.89 5009.56,538.89 ; 4880,-1555 4880,-820 ; 4880,-1550 ccw(c4940,-1550) 4940,-1610 4955,-1610 ; 4880,-830 cw(c4950,-830) 4950,-760 4975.12,-760 ; 4951.16,-2863.84 4951.16,-2072.05 cw(c5041.81,-1955.06) 5010.11,-1810.5 5030,-1790.6 ; 4960,-1609.83 cw(c4960.01,-1679.83) 5030.01,-1679.83 ; 4975.12,-760.12 ccw(c4975.12,-705.11) 5029.9,-700.13 ; 5030,-1790 5030,-1680 ; 5030,-705 5030,520 ; 5030.01,-700.11 5030,-700 ; -805.88,-1818.83 -825.11,-1799.58 -805.88,-1818.83

## Other copper
Top Layer:
  rectangle net GND: -325,-825 25,-650
  rectangle net +16V1: -325,-550 50,-350
Bottom Layer:
  rectangle net GND: -325,-850 25,-650
  rectangle net +16V1: -325,-550 50,-350

## Silkscreen, mask and mechanical layers (free items; w line width, h text height)
Top Overlay:
  drawing of 1935 lines, arcs and shapes, not listed
  text "4.6.2015" at 1600,-2500 h40
  text "BaseBoardV2.3" at 1600,-2600 h40
  text "ZJUNlict" at 2700,-2650 h40
  text "Designed By Chenxx" at 1600,-2700 h40
Mechanical 1:
  lines w10: -826.1,-1798.6 -805.88,-1818.83 cw(c-863.7,-1955.06) -750.1,-2049.92 ; -825.67,473.66 -230.44,1068.89 ; -825.17,-714.84 ccw(c-750,-714.84) -750,-790.01 ; -825,-1800.01 -825,-1695.01 cw(c-765,-1695.01) -765,-1635.01 -755,-1635.01 ccw(c-755,-1559.84) -679.84,-1559.84 ; -825,474.99 -825,-715.01 ccw(c-750,-715.01) -750,-790.01 ; -752.38,-2049.92 -752.38,-2872.63 ccw(c-665,-2872.63) -665,-2960.01 ; -680,-1560.01 -680,-850.01 ccw(c-740,-850.01) -740,-790.01 -750,-790.01 ; -676.91,-2960.01 -405,-2960.01 -235,-2790.01 ; -231,1065.99 192,1065.99 ; 190,1064.99 cw(c190,978.99) 276,978.99 ; 275,823.99 275,984.99 ; 275,824.99 ccw(c355,824.99) 354,745 ; 355,744.99 1031,744.99 ; 1032,744.99 ccw(c1031,823.99) 1110,823.99 ; 1110,824.99 1110,985.99 ; 1110,984.99 cw(c1189,984.99) 1189,1063.99 1718,1063.99 ; 1716.26,1067.79 cw(c1716.26,989.05) 1795,989.05 ; 1795,823.89 1795,998.89 ; 1795,827.63 ccw(c1873.74,827.63) 1873.74,748.89 2551.26,748.89 ccw(c2551.26,827.63) 2630,827.63 ; 2630,823.89 2630,989.05 cw(c2708.74,989.05) 2708.74,1067.79 ; 2705,1069.99 3249,1069.99 3251,1067.99 ; 3241,1067.99 cw(c3241,989.99) 3319,989.99 ; 3320,987.99 3320,828.99 ccw(c3399,828.99) 3399,749.99 4077,749.99 ; 4076,749.99 ccw(c4076,828.99) 4155,828.99 4155,989.99 cw(c4234,989.99) 4234,1068.99 ; 4232,1069.99 4233,1068.99 4480,1068.99 ; 4479.56,1068.89 5028,520.46 ; 4949.44,-2070.7 cw(c5041.81,-1955.06) 5010.11,-1810.5 ; 4950,-2070.01 4950,-2789.48 4950,-2860.01 cw(c4857.5,-2867.51) 4865,-2960.01 4595,-2960.01 4425,-2790.01 ; 4950,-760.01 4975,-760.01 ccw(c4975,-705.01) 5028.69,-716.94 ; 4950.4,-760.23 ccw(c4945,-825.01) 4880,-825.01 4880,-1550.01 ccw(c4940,-1550.01) 4940,-1610.01 4955,-1610.01 ; 4960,-1610.01 cw(c4960,-1680.01) 5030,-1680.01 5030,-1790.01 ; 5009.56,-1810.01 5028,-1791.57 ; 5030,-720.01 5030,519.99 ; 4425,-2790.01 -239.4,-2790.01 4425,-2790.01

## Dimensions
200,-2200 to 130,-943.7 on Top Overlay
1500,-2000 to 1600,-1000 on Top Overlay
1156,398 to 1200,-700 on Top Overlay
3900,-700 to 4000,300 on Top Overlay